# EAGLE board PCB (EAGLE 9.7.0)
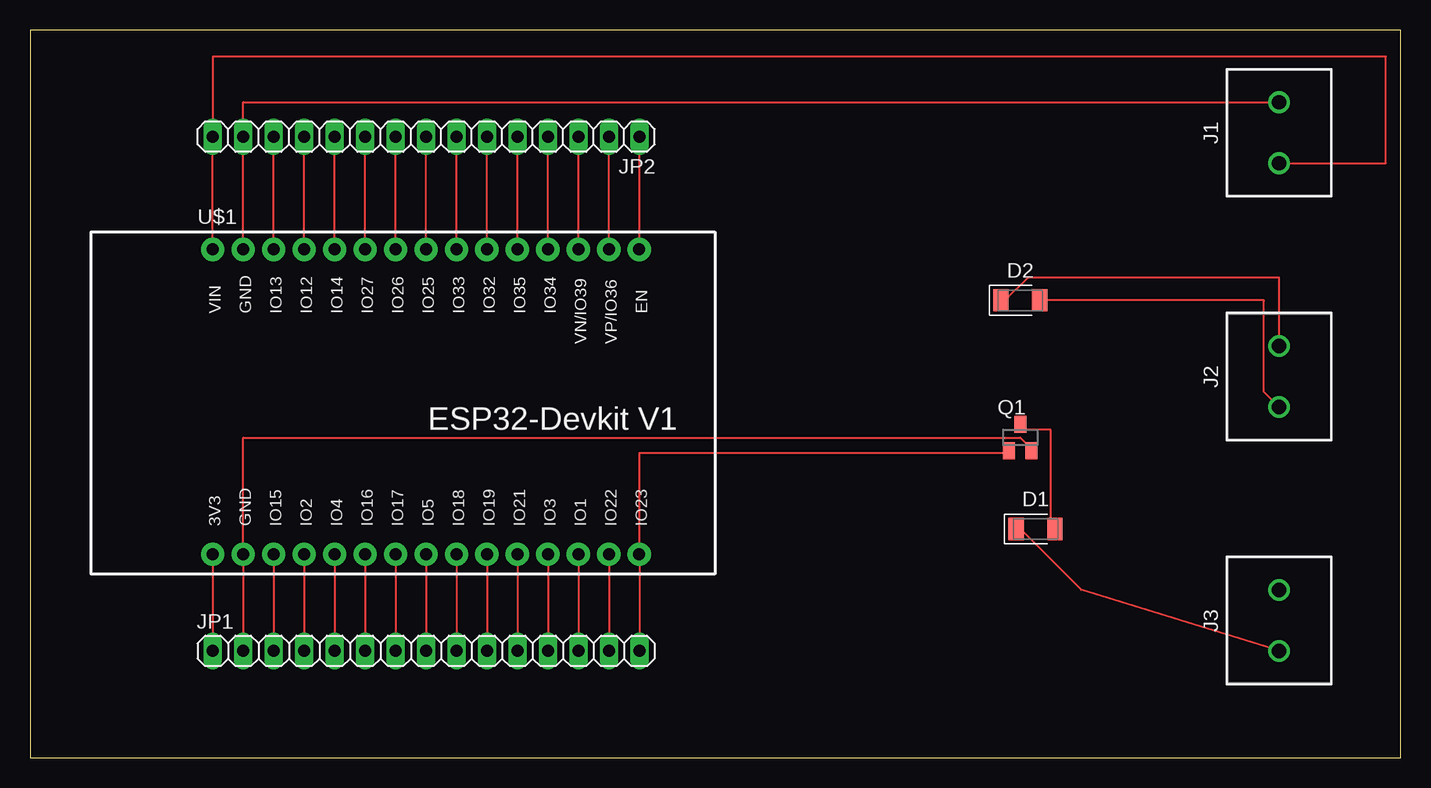
[diagram p0: board, top side]
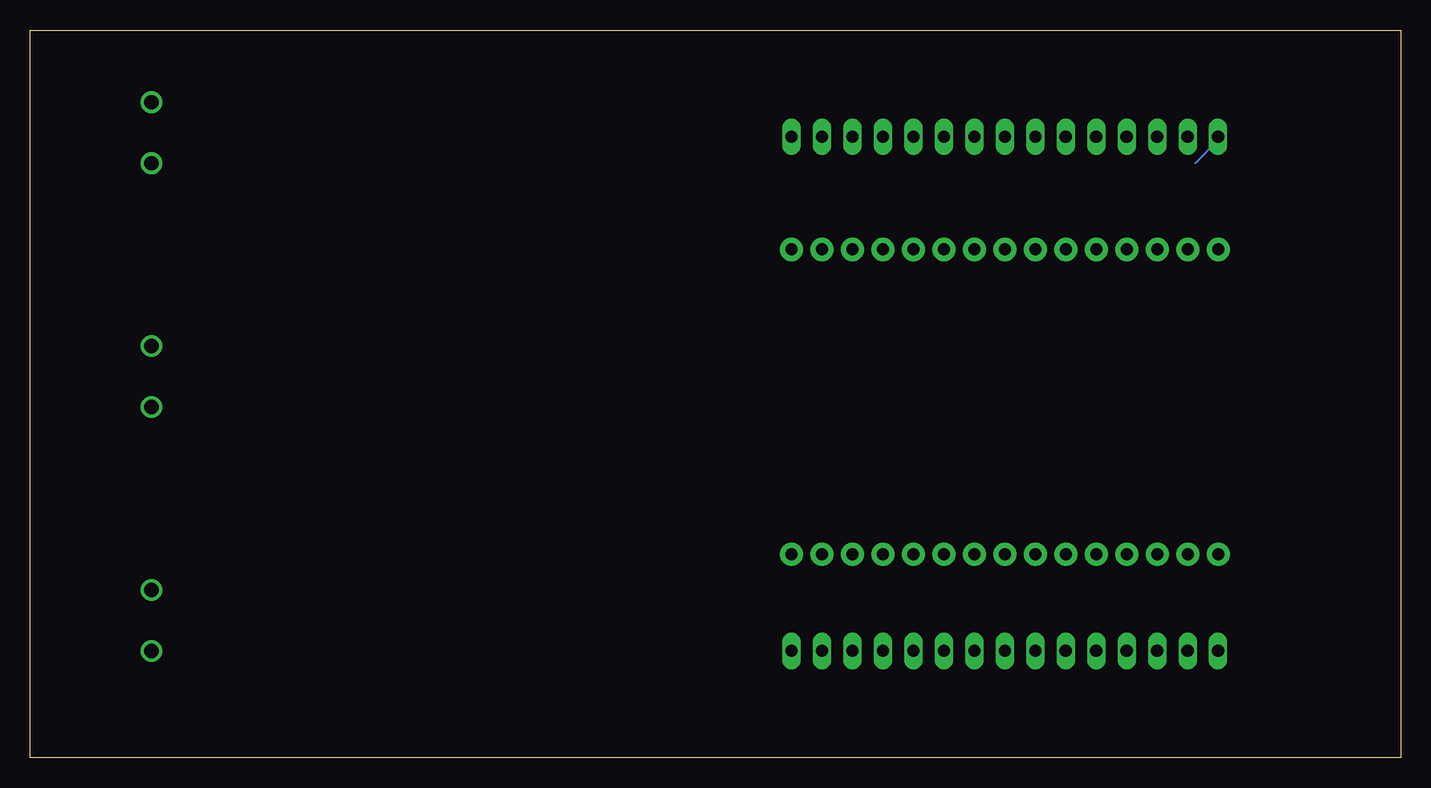
[diagram p1: board, bottom side, seen from below]

Size 114.28 x 60.63 mm. Coordinates in mm from the lower left corner, seen from the top.
Outline: 0,0 114.28,0 114.28,60.63 0,60.63 0,0
Copper layers (1*16): Top / Bottom
Stack-up Default Layer Stack: Top SilkScreen Epoxy Ink / Top SolderMask SR:Green 0.0254mm Dk 4.3 / Top Surface Finish Lead-Free 0.02mm / Top CuFoil:007 0.035mm / Dielectric-1 User Defined 1.5mm / Bottom CuFoil:007 0.035mm / Bottom Surface Finish Lead-Free 0.02mm / Bottom SolderMask SR:Green 0.0254mm Dk 4.3 / Bottom SilkScreen Epoxy Ink
Design rules: minimum copper width 6mil, minimum drill size 0.35mm, copper clearance wire_polygon to wire_polygon 6mil, copper clearance wire_polygon to pad_smd 6mil, copper clearance wire_polygon to via 6mil, copper clearance pad_smd to pad_smd 6mil, copper clearance pad_smd to via 6mil, copper clearance via to via 6mil, copper clearance smd to pad (same net) 6mil, copper clearance smd to via (same net) 6mil, copper clearance smd to smd (same net) 6mil, dimension clearance 40mil, via restrict clearance 0mil, restrict clearance 0mil, drill distance 6mil, keepout clearance 0mil

## Footprints (pad centres in the part's own frame; a part is rotated, then mirrored left to right if it is on the bottom)
DIOMELF3516 = smd 1.275 x 1.85: 1 -1.62,0; 2 1.62,0
TERMBLK_508-2N = drill 1.2: 1 -2.54,0; 2 2.54,0
1X15 = drill 1.016 long: 1 -17.78,0; 2 -15.24,0; 3 -12.7,0; 4 -10.16,0; 5 -7.62,0; 6 -5.08,0; 7 -2.54,0; 8 0,0; 9 2.54,0; 10 5.08,0; 11 7.62,0; 12 10.16,0; 13 12.7,0; 14 15.24,0; 15 17.78,0
SOT23 = smd 1 x 1.4: 1 -0.95,-1.1; 2 0.95,-1.1; 3 0,1.1
ESP32-DEVKITV1 = drill 1 pad 1.93: 3V3 -16.52,-12.27; D1 13.96,-12.27; D2 -8.9,-12.27; D3 11.42,-12.27; D4 -6.36,-12.27; D5 1.26,-12.27; D12 -8.9,13.135; D13 -11.44,13.135; D14 -6.36,13.135; D15 -11.44,-12.27; D16 -3.82,-12.27; D17 -1.28,-12.27; D18 3.8,-12.27; D19 6.34,-12.27; D21 8.88,-12.27; D22 16.5,-12.27; D23 19.04,-12.27; D25 1.26,13.135; D26 -1.28,13.135; D27 -3.82,13.135; D32 6.34,13.135; D33 3.8,13.135; D34 11.42,13.135; D35 8.88,13.135; D36 16.5,13.135; D39 13.96,13.135; EN 19.04,13.135; GND@1 -13.98,13.135; GND@2 -13.98,-12.27; VIN -16.52,13.135

## Placement (x,y rotation side)
D1  DIODE  [DIOMELF3516]  83.82,19.05 0 top
D2  DIODE  [DIOMELF3516]  82.55,38.1 0 top
J1  2828XX-2282837-2  [TERMBLK_508-2N]  104.14,52.07 90 top
J2  2828XX-2282837-2  [TERMBLK_508-2N]  104.14,31.75 90 top
J3  2828XX-2282837-2  [TERMBLK_508-2N]  104.14,11.43 90 top
JP1  [1X15]  33.02,8.89 0 top
JP2  [1X15]  33.02,51.74 180 top
Q1  NMOSFET  [SOT23]  82.55,26.67 0 top
U$1  ESP32DEVKITV1  [ESP32-DEVKITV1]  31.75,29.21 0 top

## Library data of the parts
D1 D2 = Tinkercad; CATEGORY: Diode; SUB-CATEGORY: Rectifier
J1-J3 = Connector; CATEGORY_L1: Connectors; CATEGORY_L2: Terminal Blocks; CATEGORY_L3: Screw Terminal - Rising Cage Clamp Side Wire Entry; DATASHEET: https://www.te.com/usa-en/product-282837-2.datasheet.pdf; DESCRIPTION: 2 Position Wire to Board Terminal Block Horizontal with Board 0.200" (5.08mm) Through Hole; MANUFACTURER: TE Connectivity AMP Connectors; MPN: 282837-2; OPERATING_TEMPERATURE: -40°C ~ 105°C; PACKAGE: Through Hole; PACKAGE_SIZE: NA; PART_STATUS: Active; PITCH: 0.200" (5.08mm); ROHS: Compliant; SERIES: Buchanan
JP1 JP2 = pinhead
Q1 = Tinkercad; CATEGORY: Transistor; SUB-CATEGORY: MOSFET; TYPE: N-Channel
U$1 = ESP32-DEVKITV1

## Nets
N$1: JP1.15 Q1.1 U$1.D23
N$2: JP1.14 U$1.D22
N$3: JP1.13 U$1.D1
N$4: JP1.12 U$1.D3
N$5: JP1.11 U$1.D21
N$6: JP1.10 U$1.D19
N$7: JP1.9 U$1.D18
N$8: JP1.8 U$1.D5
N$9: JP1.7 U$1.D17
N$10: JP1.6 U$1.D16
N$11: JP1.5 U$1.D4
N$12: JP1.4 U$1.D2
N$13: JP1.3 U$1.D15
N$15: JP1.1 U$1.3V3
N$16: JP2.1 U$1.EN
N$17: JP2.2 U$1.D36
N$18: JP2.3 U$1.D39
N$19: JP2.4 U$1.D34
N$20: JP2.5 U$1.D35
N$21: JP2.6 U$1.D32
N$22: JP2.7 U$1.D33
N$23: JP2.8 U$1.D25
N$24: JP2.9 U$1.D26
N$25: JP2.10 U$1.D27
N$26: JP2.11 U$1.D14
N$27: JP2.12 U$1.D12
N$28: JP2.13 U$1.D13
N$29: J1.2 JP2.14 U$1.GND@1
N$30: D2.1 J2.2
N$31: J3.2
N$32: J1.1 JP2.15 U$1.VIN
N$33: D2.2 J2.1
N$34: D1.1 J3.1
N$35: D1.2 Q1.3
N$37: JP1.2 Q1.2 U$1.GND@2

## Tracks (layer width: path | path; a pad name or v marks a point on that pad's centre or on a via)
N$1
  Top 0.152: Q1.1 81.28,25.4 50.8,25.4 50.8,17.14 U$1.D23 50.8,16.51 JP1.15
N$2
  Top 0.152: JP1.14 48.26,16.51 U$1.D22
N$3
  Top 0.152: JP1.13 45.72,16.51 U$1.D1
N$4
  Top 0.152: JP1.12 43.18,16.51 U$1.D3
N$5
  Top 0.152: JP1.11 40.64,16.51 U$1.D21
N$6
  Top 0.152: JP1.10 38.1,16.51 U$1.D19
N$7
  Top 0.152: JP1.9 35.56,16.51 U$1.D18
N$8
  Top 0.152: JP1.8 33.02,16.51 U$1.D5
N$9
  Top 0.152: JP1.7 30.48,16.51 U$1.D17
N$10
  Top 0.152: JP1.6 27.94,16.51 U$1.D16
N$11
  Top 0.152: JP1.5 25.4,16.51 U$1.D4
N$12
  Top 0.152: JP1.4 22.86,16.51 U$1.D2
N$13
  Top 0.152: JP1.3 20.32,16.51 U$1.D15
N$15
  Top 0.152: JP1.1 15.24,16.51 U$1.3V3
N$16
  Top 0.152: JP2.1 50.8,42.55 U$1.EN
N$17
  Top 0.152: JP2.2 48.26,42.55 U$1.D36
N$18
  Top 0.152: JP2.3 45.72,42.55 U$1.D39
N$19
  Top 0.152: JP2.4 43.18,42.55 U$1.D34
N$20
  Top 0.152: JP2.5 40.64,42.55 U$1.D35
N$21
  Top 0.152: JP2.6 38.1,42.55 U$1.D32
N$22
  Top 0.152: JP2.7 35.56,42.55 U$1.D33
N$23
  Top 0.152: JP2.8 33.02,42.55 U$1.D25
N$24
  Top 0.152: JP2.9 30.48,42.55 U$1.D26
N$25
  Top 0.152: JP2.10 27.94,42.55 U$1.D27
N$26
  Top 0.152: JP2.11 25.4,42.55 U$1.D14
N$27
  Top 0.152: JP2.12 22.86,42.55 U$1.D12
N$28
  Top 0.152: JP2.13 20.32,42.55 U$1.D13
N$29
  Top 0.152: U$1.GND@1 17.78,42.55 JP2.14 17.78,54.61 J1.2
N$30
  Top 0.152: J2.2 104.14,40.01 83.19,40.01 81.28,38.1 D2.1
N$32
  Top 0.152: U$1.VIN 15.24,42.55 JP2.15 15.24,58.42 113.03,58.42 113.03,49.53 J1.1
  Bottom 0.152: 17.14,49.53 15.24,51.44 JP2.15
N$33
  Top 0.152: D2.2 102.87,38.1 102.87,30.48 J2.1
N$34
  Top 0.152: J3.1 87.63,13.97 82.55,19.05 D1.1
N$35
  Top 0.152: Q1.3 82.55,27.3 85.09,27.3 85.09,19.05 D1.2
N$37
  Top 0.152: Q1.2 83.19,26.04 82.55,26.67 17.78,26.67 17.78,17.14 U$1.GND@2 17.78,16.51 JP1.2